# Altium PCB QR REEADER.PcbDoc
Units mil, origin at the board's own origin, x right, y up, seen from the top; angles counter-clockwise.
Board outline 2755 x 2755.91 mil, 2 copper layers (Top Layer, Bottom Layer); 51 components, 39 nets, 195 pads, 82 vias.
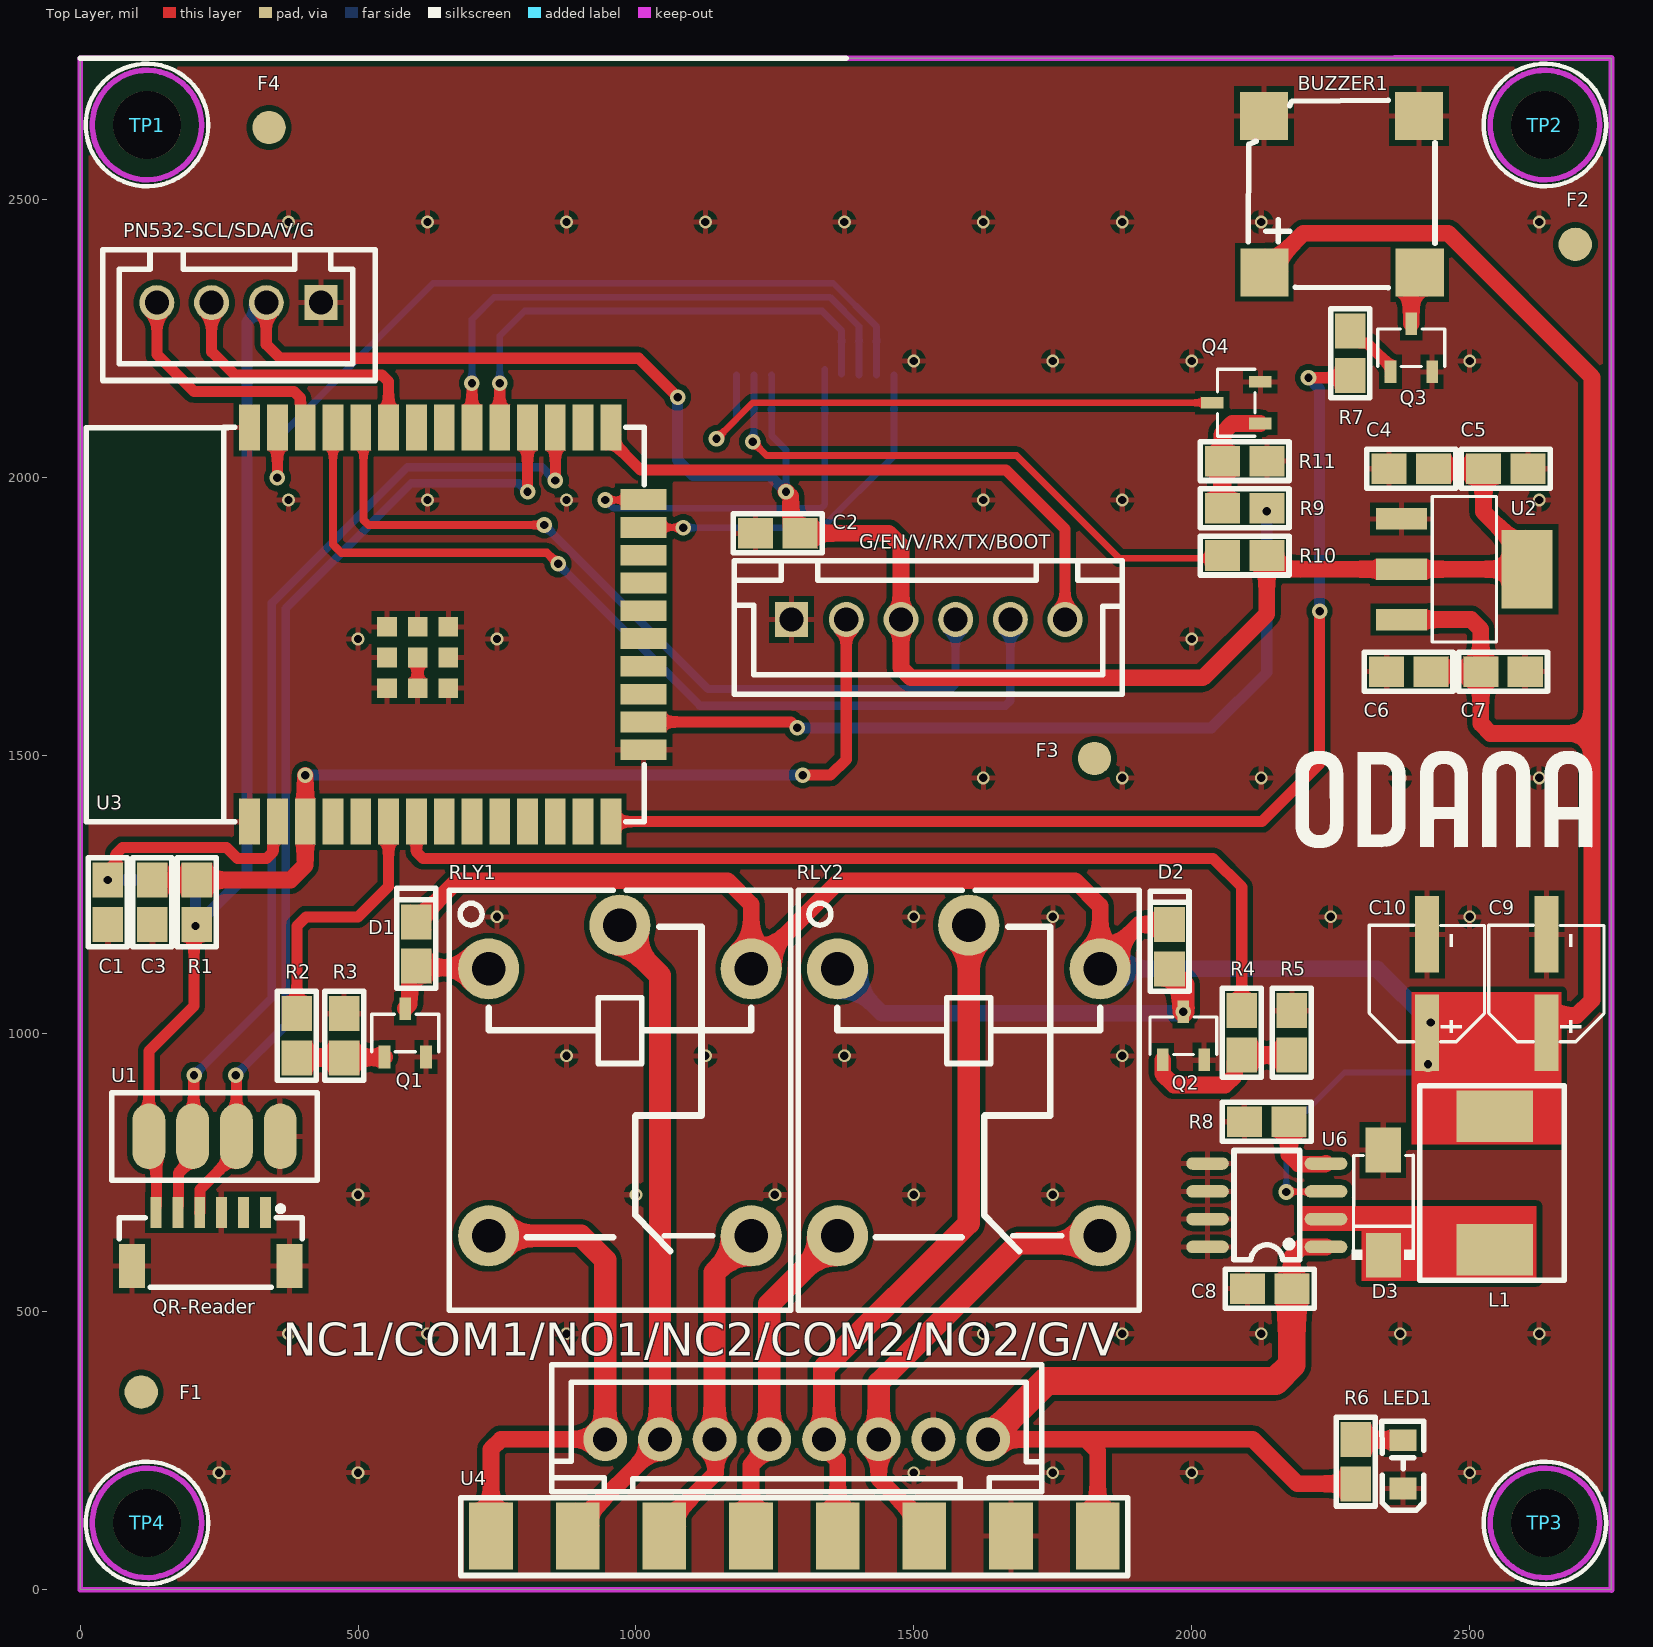
[diagram p0: Top Layer view]
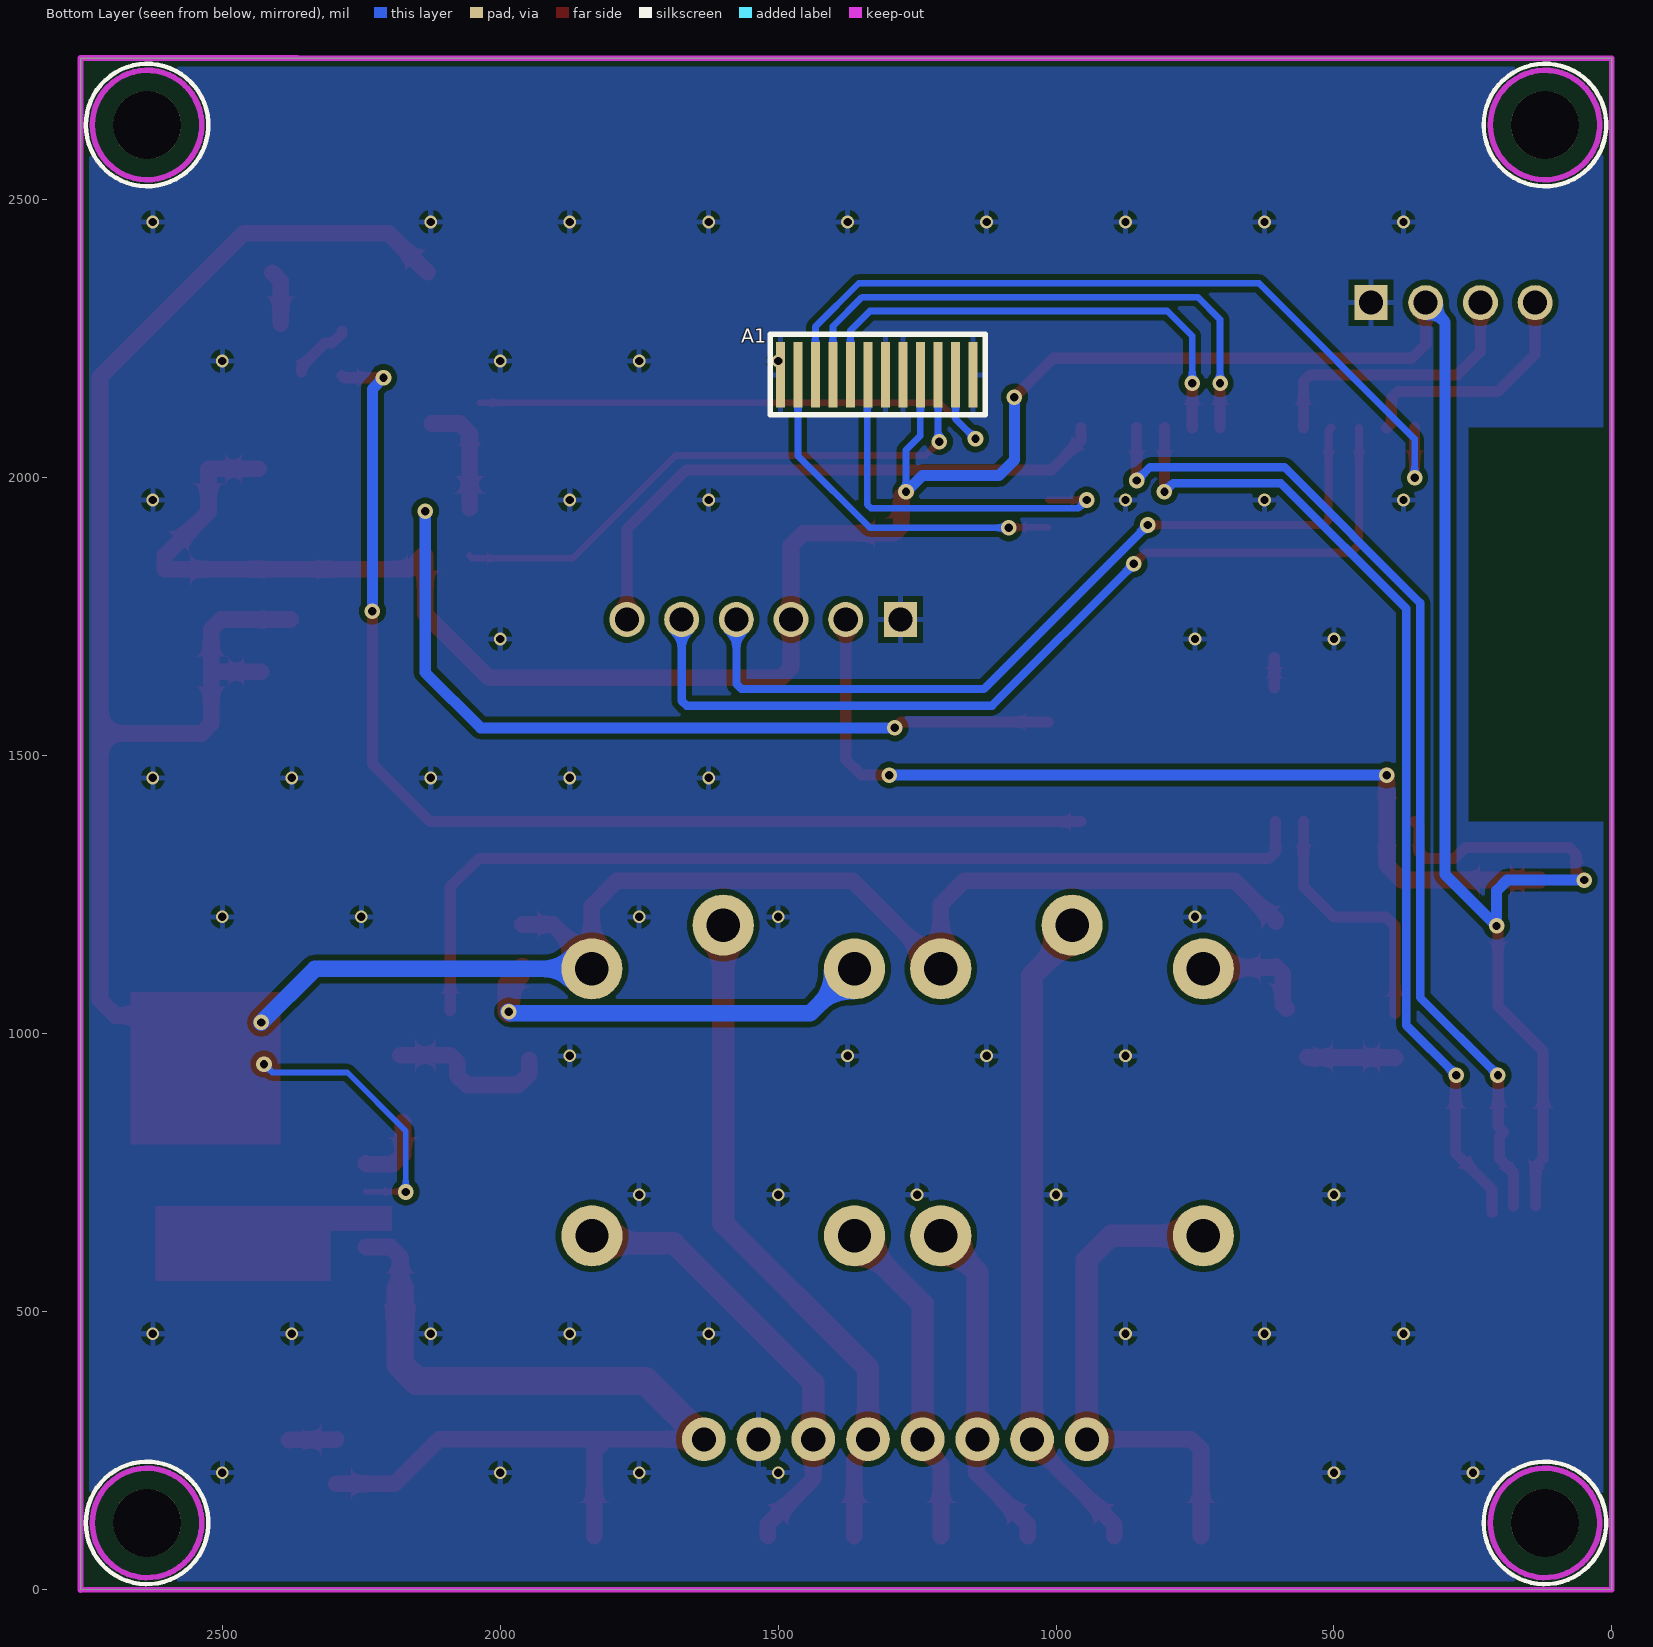
[diagram p1: Bottom Layer view, seen from below]

## Layer stack, top to bottom
Top Solder: solder mask 0.4, Solder Resist, Dk 3.5
Top Layer: signal copper 1.4
Dielectric 1: dielectric 12.6, FR-4, Dk 4.8
Bottom Layer: signal copper 1.4
Bottom Solder: solder mask 0.4, Solder Resist, Dk 3.5

## Board outline
0,0 0,2754.75 0.25,2755 2755,2755 2755,-0.91

## Design rules (kind name [scope] priority, off if disabled: settings)
Clearance [All] p1: gap=10 ignorepadtopadclearanceinfootprint=TRUE except(0: Arc-Hole Track-Hole SMDPad-Hole THPad-Hole Via-Hole Fill-Hole Poly-Hole Region-Hole Text-Hole)
ComponentClearance [All] p1: gap=-39.37 collisioncheckmode=3 verticalgap=-39.37 showdistances=FALSE donotcheckwithout3dbody=TRUE
HoleSize [All] p1: absolutevalues=TRUE maxlimit=250 minlimit=1 maxpercent=80.000 minpercent=20.000
PolygonConnect [All] p1: connectstyle=Relief reliefconductorwidth=10 reliefentries=4 polygonreliefangle="90 Angle" airgapwidth=10
RoutingVias [All] p1: holewidth=28 width=50 viastyle="Through Hole" minholewidth=28 minwidth=50 maxholewidth=28 maxwidth=50
SolderMaskExpansion [All] p1: expansion=4 istentingtop=FALSE
Width [All] p1: maxlimit=200 minlimit=5 preferedwidth=10
28 further rules are at their usual default settings.

## Components (designator, comment, footprint, x,y, rotation, side; value= is the part's Value field where it differs from the comment)
A1 "" "TFT SCREEN" 1149.41,2185 r180 bottom locked
BUZZER1 "klj-8530-5027" BUZ-SMD_4P-L8.5-W8.5-TL 2270,2510 r90 top
C1 "Cap Semi" 0805 50,1236.16 r90 top value=106
C2 "Cap Semi" 0805 1255,1900 r180 top value=104
C3 "Cap Semi" 0805 130,1236.16 r90 top value=104
C4 "Cap Semi" 0805 2395,2016.16 r0 top value=104
C5 "Cap Semi" 0805 2565,2016.16 r0 top value=105
C6 "Cap Semi" 0805 2390,1651.16 r180 top value=105
C7 "Cap Semi" 0805 2560,1651.16 r180 top value=104
C8 "105" 0805 2140,541.16 r0 top value=105/50V
C9 "JVJ16V47M5X5" CAP-SMD_BD5.0-L5.3-W5.3-LS6.5-FD-1 2638.55,1090.06 r90 top
C10 "JVJ16V47M5X5" CAP-SMD_BD5.0-L5.3-W5.3-LS6.5-FD-1 2423.55,1090.06 r90 top
D1 "1N4148WS" SOD323 605,1161.16 r90 top
D2 "1N4148WS" SOD323 1960,1156.16 r90 top
D3 "ss34_c47018524" SMA_L4.3-W2.6-LS5.0-RD 2344.6,695.76 r90 top
F1 "" FIDUCIAL-1.5X3 110,355 r0 top
F2 "" FIDUCIAL-1.5X3 2690,2420 r0 top
F3 "" FIDUCIAL-1.5X3 1825,1495 r0 top
F4 "" FIDUCIAL-1.5X3 340,2630 r0 top
G/EN/V/RX/TX/BOOT "ZX-XH2.54-6PZZ" CONN-TH_6P-P2.50_ZX-XH2.54-6PZZ 1526.07,1745 r180 top
L1 "FXL0630-68R-M" "0630 - duplicate" 2545,731.16 r270 top
LED1 "ncd0805r1" LED0805-RD 2380,225 r90 top
NC1/COM1/NO1/NC2/COM2/NO2/G/V "zx-xh2.54-8pzz" CONN-TH_8P-P2.50-XH2.54-8P 1289.2,269.99 r180 top
PN532-SCL/SDA/V/G "ZX-XH2.54-4PZZ" CONN-TH_4P-P2.50_4PIN 285.8,2315 r180 top
Q1 "S8050 J3Y" SOT-23-3_L3.0-W1.7-P0.95-LS2.9-BR 585,1001.16 r270 top
Q2 "S8050 J3Y" SOT-23-3_L3.0-W1.7-P0.95-LS2.9-BR 1985,996.16 r270 top
Q3 "S8050 J3Y" SOT-23-3_L3.0-W1.7-P0.95-LS2.9-BR 2395,2233.81 r270 top
Q4 "S8050 J3Y" SOT-23-3_L3.0-W1.7-P0.95-LS2.9-BR 2080,2135 r0 top
QR-Reader "zx-sh1.0-6plt" CONN-SMD_6P-P1.00_ZX-SH1.0-6PLT 235,630 r0 top
R1 "Res3" 0805 210,1236.16 r90 top value=10K
R2 "R0805-1K" 0805 390,996.16 r270 top value=1K
R3 "R0805-10K" 0805 475,996.16 r270 top value=1K
R4 "R0805-1K" 0805 2090,1001.16 r270 top value=1K
R5 "R0805-10K" 0805 2180,1001.16 r270 top value=1K
R6 "R0805-4K7" 0805 2295,230 r270 top value=1K
R7 "R0805-1K" 0805 2285,2223.81 r90 top value=1K
R8 "100K" 0805 2135,841.16 r180 top
R9 "Res3" 0805 2095,1945 r0 top value=2K2
R10 "Res3" 0805 2095,1860 r0 top value=10R
R11 "Res3" 0805 2095,2030 r0 top value=10K
RLY1 "srd-05vdc-sl-c" RELAY-TH_SRD-XXVDC-XL-C 971.2,915.66 r270 top
RLY2 "srd-05vdc-sl-c" RELAY-TH_SRD-XXVDC-XL-C 1598.8,915.66 r270 top
TP1 "" "PCBComponent_1 - duplicate" 120,2635 r0 top locked
TP2 "" "PCBComponent_1 - duplicate" 2635,2635 r0 top locked
TP3 "" "PCBComponent_1 - duplicate" 2635,120 r0 top
TP4 "" "PCBComponent_1 - duplicate" 120,120 r0 top
U1 "" 2.54_PAD_4P 241.89,815 r270 top
U2 "AMS1117-3.3" SOT-223-3_L6.7-W3.7-P2.30-LS7.0-BR 2480,1835.41 r180 top
U3 "ESP32-WROOM-32E-N4" WIFI-SMD_ESP32-WROOM-32E 659.43,1735.66 r0 top
U4 "" 3.96_PAD_8P 1285,135 r270 top
U6 "XL1509-5.0E1" SOIC-8_L5.0-W4.0-P1.27-LS6.0-BL 2135,691.16 r90 top

## Footprints (in the part's own frame and the unit in brackets; to place one, negate y for a bottom-side part, rotate by r counter-clockwise, add the part's x,y. Pads: shape width x height; smd on the part's side, far side on the other; paste and mask are expansions set on the pad)
2.54_PAD_4P [mm]
  oval 3x1.5 smd paste+0 mask+0.2: 1(0,3) 2(0,1) 3(0,-1) 4(0,-3)
  silkscreen extent -2,-4.7 2,4.7
3.96_PAD_8P [mil]
  rect 120x78.74 smd paste+0 mask+2: 1(38.86,-545.65) 2(38.86,-389.75) 3(38.86,-233.84) 4(38.86,-77.94) 5(38.86,77.97) 6(38.85,233.87) 7(38.85,389.78) 8(38.85,545.68)
  silkscreen extent -30,-600 110,600
"0630 - duplicate" [mm]
  rect 2.35x3.5 smd: 1(-3.048,0) 2(3.048,0)
  silkscreen extent -4.45,-3.43 4.45,3.17
0805 [mm] "Chip Capacitor, Body 2.0x1.3mm, IPC High Density"
  rect 1.6x1.4 smd: 1(-1.016,0) 2(1.016,0)
  silkscreen extent -2.03,-0.89 2.03,0.89, body extent -1.1,-0.72 1.1,0.72, height 1.4
BUZ-SMD_4P-L8.5-W8.5-TL [mil]
  rect 86.6x86.6 smd: 1(-140.5,139.4) 2(-141,-140.1) 3(140.9,-138.9) 4(141,140)
  silkscreen extent -168,-168 169,168
CAP-SMD_BD5.0-L5.3-W5.3-LS6.5-FD-1 [mm]
  rect 3.5x1.1 smd paste+0.051: 1(-2.245,0) 2(2.245,0)
  silkscreen extent -2.66,-2.62 2.66,2.65
CONN-SMD_6P-P1.00_ZX-SH1.0-6PLT [mil]
  rect 19.7x55.1 smd paste+0 mask+2: 1(98.4,48.2) 2(59,48.2) 3(19.6,48.2) 4(-19.7,48.2) 5(-59.1,48.2) 6(-98.5,48.2)
  rect 47.2x78.7 smd paste+0 mask+2: 7(-141.8,-48.2) 8(141.7,-48.2)
  silkscreen extent -164,-87 164,60
CONN-TH_4P-P2.50_4PIN [mm]
  rect 1.524x1.6 hole 1.1: 1(-3.75,0)
  round 1.6 hole 1.1: 2(-1.25,0) 3(1.25,0) 4(3.75,0)
  silkscreen extent -6.22,-2.41 6.22,3.56
CONN-TH_6P-P2.50_ZX-XH2.54-6PZZ [mm]
  rect 1.524x1.6 hole 1.1: 1(6.25,0)
  round 1.6 hole 1.1 copper offset 0,0: 2(3.75,0) 4(-1.25,0) 5(-3.75,0) 6(-6.25,0)
  round 1.6 hole 1.1: 3(1.25,0)
  silkscreen extent -8.87,-2.68 8.87,3.42
CONN-TH_8P-P2.50-XH2.54-8P [mm]
  round 2 hole 1.1: 1(8.75,0) 2(6.25,0) 3(3.75,0) 4(1.25,0) 5(-1.25,0) 6(-3.75,0) 7(-6.25,0) 8(-8.75,0)
  silkscreen extent -11.2,-3.4 11.2,2.4
FIDUCIAL-1.5X3 [mil]
  round 60 smd: 17(0,0)
LED0805-RD [mil]
  rect 39.4x49.2 smd: 1(-43.3,0) 2(43.3,0)
  silkscreen extent -83,-37 78,38
"PCBComponent_1 - duplicate" [mm]
  round 3.1 hole 3.1 unplated paste-2539.97: ""(0.011,-0.01)
  silkscreen extent -2.79,-2.81 2.81,2.79
RELAY-TH_SRD-XXVDC-XL-C [mil]
  round 110 hole 60: 1(-200.8,-236.2) 2(279.5,-236.2) 3(279.5,236.2) 4(-200.8,236.3) 5(-279.5,0)
  silkscreen extent -343,-307 413,307
SMA_L4.3-W2.6-LS5.0-RD [mil]
  rect 80.6x63.8 smd: 1(-94.6,-0.4) 2(94.7,0.4)
  silkscreen extent -103,-57 85,57
SOD323 [mm] "Chip Capacitor, Body 2.0x1.3mm, IPC High Density"
  rect 1.6x1.4 smd: 1(-1.016,0) 2(1.016,0)
  silkscreen extent -2.03,-0.89 2.54,0.89, body extent -1.1,-0.72 1.1,0.72, height 1.4
SOIC-8_L5.0-W4.0-P1.27-LS6.0-BL [mil]
  oval 22.4x76.8 smd: 1(-75,-106.5) 2(-25,-106.5) 3(25,-106.5) 4(75,-106.5) 5(75,106.5) 6(25,106.5) 7(-25,106.5) 8(-75,106.5)
  silkscreen extent -98,-59 98,59
SOT-23-3_L3.0-W1.7-P0.95-LS2.9-BR [mil]
  rect 40.85x20.95 smd: 1(43.36,-37.4) 2(43.36,37.4) 3(-43.36,0)
  silkscreen extent -34,-60 34,60
SOT-223-3_L6.7-W3.7-P2.30-LS7.0-BR [mm]
  rect 2.34x0.98 smd paste+0 mask+0.051: 1(2.606,-2.3) 2(2.606,0) 3(2.606,2.3)
  rect 2.34x3.6 smd paste+0 mask+0.051: 4(-3.134,0)
  silkscreen extent -1.74,-3.33 1.21,3.33
"TFT SCREEN" [mm]
  rect 0.4x3 smd paste+0 mask+0.102: 1(0,0) 2(-0.8,0) 3(-1.6,0) 4(-2.4,0) 5(-3.2,0) 6(-4,0) 7(-4.8,0) 8(-5.6,0) 9(-6.4,0) 10(-7.2,0) 11(-8,0) 12(-8.8,0)
  silkscreen extent -9.27,-1.83 0.57,1.86
WIFI-SMD_ESP32-WROOM-32E [mm]
  rect 0.95x2.1 smd: 1(-9.003,-9) 2(-7.733,-9) 3(-6.463,-9) 4(-5.193,-9) 5(-3.923,-9) 6(-2.653,-9) 7(-1.383,-9) 8(-0.113,-9) 9(1.157,-9) 10(2.427,-9) 11(3.697,-9) 12(4.967,-9) 13(6.237,-9) 14(7.507,-9) 25(7.507,9) 26(6.237,9) 27(4.967,9) 28(3.697,9) 29(2.427,9) 30(1.157,9) 31(-0.113,9) 32(-1.383,9) 33(-2.653,9) 34(-3.923,9) 35(-5.193,9) 36(-6.463,9) 37(-7.733,9) 38(-9.003,9)
  rect 2.1x0.95 smd: 15(9.003,-5.715) 16(9.003,-4.445) 17(9.003,-3.175) 18(9.003,-1.905) 19(9.003,-0.635) 20(9.003,0.635) 21(9.003,1.905) 22(9.003,3.175) 23(9.003,4.445) 24(9.003,5.715)
  rect 0.9x0.9 smd: 39(-2.722,-2.9) 39(-2.722,-1.5) 39(-2.722,-0.1) 39(-1.322,-2.9) 39(-1.322,-1.5) 39(-1.322,-0.1) 39(0.078,-2.9) 39(0.078,-1.5) 39(0.078,-0.1)
  silkscreen extent -16.48,-9 9.02,9.02

## Part data
A1: library part TFT1.54
BUZZER1: JLCPCB Part Class="Extended Part", LCSC Part Name=贴片蜂鸣器, Manufacturer=KELIKING(凯丽金), ManufacturerPart=KLJ-8530-5027, AddInBom=yes, ConvertToPcb=yes, Datasheet=https://item.szlcsc.com/datasheet/KLJ-8530-5027/579412.html, FootprintName=BUZ-SMD_4P-L8.5-W8.5-TL, ModelId=7c587082926741939d0805ac9c9a57ec, ModelName=BUZ-SMD_4P-L8.5-W8.5-H4.0, ModelTransform=342.519,342.519,0,270,0,0,0.5,0.435,0, Supplier=LCSC, Supplier Footprint=SMD,8.5x8.5mm, SupplierPart=C556938, Symbol=KLJ-8530-5027
C1 C2 C3 C4 C5 C6 C7: "Capacitor (Semiconductor SIM Model)", LatestRevisionDate=29-May-2009, LatestRevisionNote="IPC-7351 Footprint Added.", PackageDescription="Chip Capacitor", PackageReference=C1206, Published=8-Jun-2000, Publisher="Altium Limited"
C8: library part "Cap Semi", "Capacitor (Semiconductor SIM Model)", LatestRevisionDate=29-May-2009, LatestRevisionNote="IPC-7351 Footprint Added.", PackageDescription="Chip Capacitor", PackageReference=C1206, Published=8-Jun-2000, Publisher="Altium Limited"
D3: "二极管配置:独立式;直流反向耐压(Vr):40V;整流电流:3A;", Current - Rectified=3A, JLCPCB Part Class="Extended Part", LCSC Part Name="电压:40V 电流:3A", Manufacturer=baocheng(宝乘), ManufacturerPart=SS34, Non-Repetitive Peak Forward Surge Current=80A, Operating Junction Temperature Range=-55℃~+125℃, Voltage - DC Reverse(Vr)=40V, AddInBom=yes, ConvertToPcb=yes, Datasheet=https://item.szlcsc.com/datasheet/SS34/49200019.html, Diode Configuration=独立式, FootprintName=SMA_L4.3-W2.6-LS5.0-RD, ModelId=8d2dd2e50a3a4b27821fa63d469a8f11, ModelName=SMA_L4.3-W2.6-LS5.0-RD, ModelTransform=196.85,102.362,0,0,0,0,0,0,0, Supplier=LCSC, Supplier Footprint=SMA, SupplierPart=C47018524, Symbol=SS34_C47018524
F1 F2 F3 F4: library part FIDUCIAL1.5X3
G/EN/V/RX/TX/BOOT PN532-SCL/SDA/V/G: Current Rating (Max)=3A, JLCPCB Part Class="Extended Part", Manufacturer=Megastar(兆星), Operating Temperature Range=-25℃~+85℃, Add into BOM=yes, Contact Material=黄铜, Contact Plating=锡, Convert to PCB=yes, Mounting Style=直插, Number of Rows=1, Pitch=2.54mm, Reference Series=XH, Row Spacing=-, Supplier=LCSC
  G/EN/V/RX/TX/BOOT: Datasheet=https://atta.szlcsc.com/upload/public/pdf/source/20230619/1243AD0A516E39CD3D274D8985780568.pdf, Device=ZX-XH2.54-6PZZ, LCSC Part Name=ZX-XH2.54-6PZZ, Manufacturer Part=ZX-XH2.54-6PZZ, Number of Pins=6P, Number of PINs Per Row=6, Pins Structure=1x6P, Supplier Footprint=插件,P=2.54mm, Supplier Part=C7429636, Symbol=ZX-XH2.54-6PZZ
  PN532-SCL/SDA/V/G: Datasheet=https://atta.szlcsc.com/upload/public/pdf/source/20230619/B529A2163E0159A644AB3383D208FB03.pdf, Device=ZX-XH2.54-4PZZ, LCSC Part Name=ZX-XH2.54-4PZZ, Manufacturer Part=ZX-XH2.54-4PZZ, Number of Pins=4P, Number of PINs Per Row=4, Pins Structure=1x4P, Supplier Footprint=插件,P=2.5mm, Supplier Part=C7429634, Symbol=ZX-XH2.54-4PZZ
L1: library part FXL0630-8R2-M, Symbol=FXL0630-8R2-M
LED1: "灯头类型:-;发光颜色:红色;正向压降(Vf):1.6V~2.6V;功率:65mW;正向电流:25mA;波长:615nm~630nm;二极管配置:独立二极管;透镜颜色:-;色温:-;发光强度:195mcd;发光角度:130°;载带方式:-;工作温度:-30℃~+85℃;", Color Temperature=-, Forward Current=25mA, Illumination Color=红色, JLCPCB Part Class="Basic Part", LCSC Part Name=片式发光二极管, Manufacturer=国星光电, ManufacturerPart=NCD0805R1, Operating Temperature=-30℃~+85℃, Power(Watts)=65mW, Voltage - Forward(Vf)=1.6V~2.6V, AddInBom=yes, ConvertToPcb=yes, Datasheet=https://item.szlcsc.com/datasheet/NCD0805R1/85425.html, Diode Configuration=独立二极管, FootprintName=LED0805-RD, Lamp Holder Type=-, Lens Color=-, Luminous Intensity=195mcd, ModelId=b1c5ed7a4f6e46d3bc6f6cc7c20f3fea, ModelName=LED0805-RD, ModelTransform=79.527,49.2125,0,0,0,0,0,0,0, Mounting Style=-, Peak Wavelength=630nm, Supplier=LCSC, Supplier Footprint=0805, SupplierPart=C84256, Symbol=FC-2012HRK-620D, Viewing Angle=130°, Wavelength - Dominant=615nm~630nm
NC1/COM1/NO1/NC2/COM2/NO2/G/V: "插针结构:1x8P;间距:2.5mm;安装方式:直插;参考系列:XH;总PIN数:8P;排数:1;每排PIN数:8;行距:-;额定电流:3A;触头材质:黄铜;触头镀层:锡;工作温度:-25℃~+85℃;", Color=白色, Current Rating=3A, Flame Retardant Rating=UL94V-0, JLCPCB Part Class="Extended Part", LCSC Part Name="1x8P 间距:2.5mm 直插 系列:XH", Manufacturer=Megastar(兆星), ManufacturerPart=ZX-XH2.54-8PZZ, Operating Temperature=-25℃~+85℃, Voltage Rating=250V, AddInBom=yes, Contact Material=黄铜, Contact Plating=锡, ConvertToPcb=yes, Datasheet=https://item.szlcsc.com/datasheet/ZX-XH2.54-8PZZ/8427555.html, FootprintName=CONN-TH_8P-P2.50-XH2.54-8P, ModelId=385b1d4b778b4141959d674ea048df76, ModelName=CONN-TH_8P-P2.50-XH2.54-8P, ModelTransform=885.825,228.346,0,180,0,0,0.591,-19.094,-137.795, Mounting Type=直插, Number of Pins=8P, Number of PINs Per Row=8, Number of Rows=1, Pins Structure=1x8P, Pitch=2.5mm, Plastic Material=PA66, Reference Series=XH, Row Spacing=-, Supplementary Features=-, Supplier=LCSC, Supplier Footprint=插件,P=2.5mm, SupplierPart=C7429638, Symbol=ZX-XH2.54-8PZZ, X-Length of Bottom Edge on Board (Spacing Line)=22.5mm, Y-Width of Bottom Edge on Board=5.9mm, Z-Height of the Board=7mm
Q1 Q2 Q3 Q4: library part "S8050 J3Y_C2146", Collector Current (Ic)=500mA, Collector Cut-Off Current (Icbo)=100nA, Collector-Emitter Breakdown Voltage (Vceo)=25V, Collector-Emitter Saturation Voltage (VCE(sat)@Ic,Ib)=600mV@500mA,50mA, DC Current Gain (hFE@Ic,Vce)=200@50mA,1V, JLCPCB Part Class="Basic Part", LCSC Part Name="S8050 J3Y(RANGE:200-350) H档(200-350)", Manufacturer=CJ(江苏长电/长晶), Operating Temperature=-, Power Dissipation (Pd)=300mW, Transition Frequency (fT)=150MHz, Add into BOM=yes, Convert to PCB=yes, Datasheet=https://atta.szlcsc.com/upload/public/pdf/source/20140809/1457707209234.pdf, Device="S8050 J3Y_C2146", Manufacturer Part="S8050 J3Y", Name="S8050 J3Y", Supplier=LCSC, Supplier Footprint=SOT-23, Supplier Part=C2146, Symbol=S8050_C2146, Transistor Type=NPN
QR-Reader: "插针结构:1x6P;间距:1mm;安装方式:立贴;参考系列:SH;总PIN数:6P;排数:1;每排PIN数:6;行距:-;额定电流:1A;触头材质:黄铜;触头镀层:锡;工作温度:-40℃~+85℃;", Color=米色, Current Rating=1A, Flame Retardant Rating=-, JLCPCB Part Class="Extended Part", LCSC Part Name="1x6P 间距:1mm 立贴 系列:SH", Manufacturer=Megastar(兆星), ManufacturerPart=ZX-SH1.0-6PLT, Operating Temperature=-40℃~+85℃, Voltage Rating=50V, AddInBom=yes, Contact Material=黄铜, Contact Plating=锡, ConvertToPcb=yes, Datasheet=https://item.szlcsc.com/datasheet/ZX-SH1.0-6PLT/8430324.html, FootprintName=CONN-SMD_6P-P1.00_ZX-SH1.0-6PLT, ModelId=10d6ea9a3ab947538cc5c23cc299ff3f, ModelName=CONN-SMD_6P-P1.00_ZX-SH1.0-6PLT, ModelTransform=328.7395,147.638,0,0,0,0,0,-13.071,0, Mounting Type=立贴, Number of Pins=6P, Number of PINs Per Row=6, Number of Rows=1, Pins Structure=1x6P, Pitch=1mm, Plastic Material=LCP, Reference Series=SH, Row Spacing=-, Supplementary Features=辅助焊脚, Supplier=LCSC, Supplier Footprint=SMD,P=1mm, SupplierPart=C7430455, Symbol=ZX-SH1.0-6PLT, X-Length of Bottom Edge on Board (Spacing Line)=8.35mm, Y-Width of Bottom Edge on Board=3.05mm, Z-Height of the Board=4.4mm
R1 R9 R10 R11: "Resistor", LatestRevisionDate=29-May-2009, LatestRevisionNote="IPC-7351 Footprint Added.", PackageDescription="Chip Resistor", PackageReference=J1-0603, Published=8-Jun-2000, Publisher="Altium Limited"
R2 R3 R4 R5 R6 R7 R8: library part Res3, "Resistor", LatestRevisionDate=29-May-2009, LatestRevisionNote="IPC-7351 Footprint Added.", PackageDescription="Chip Resistor", PackageReference=J1-0603, Published=8-Jun-2000, Publisher="Altium Limited"
RLY1 RLY2: "线圈电压:5V;触点形式:一组转换:1C(单刀双掷-转换);触点容量(电阻负载):-;最大切换电压:250V@AC;最大切换电流:15A;", Coil Rated Power=360mW, Coil Resistance=70Ω, Coil Voltage=5V, Contact Rating=-, Contact Resistance=100mΩ, JLCPCB Part Class="Extended Part", LCSC Part Name="蓝色 单组转换型继电器", Manufacturer=松乐, ManufacturerPart=SRD-05VDC-SL-C, Switching Current(Max)=15A, Switching Voltage(Max)=250V@AC, AddInBom=yes, Coil Type=无极性-单线圈, Contact Form=一组转换:1C(单刀双掷-转换), ConvertToPcb=yes, Datasheet=https://item.szlcsc.com/datasheet/SRD-05VDC-SL-C/36422.html, FootprintName=RELAY-TH_SRD-XXVDC-XL-C, Length=19.2mm, ModelId=d0eda9b8bf8746d18ae810ab88dc78e7, ModelName=RELAY-TH_L19.2-W15.6-H15.8, ModelTransform=755.904,622.4397,0,0,0,0,34.882,0,-118.11, Number of Pins=5, Operate Time=10ms, Release Time=10ms, Supplier=LCSC, Supplier Footprint=插件,19.2x15.6mm, SupplierPart=C35449, Symbol=SRD-05VDC-SL-C, Width=15.6mm
TP1 TP2 TP3 TP4: library part M3铜柱
U1: library part 当面2.54焊盘
U2: library part AMS1117-3.3_C917183
U3: JLCPCB Part Class="Extended Part", LCSC Part Name="通用型Wi-Fi+BT+BLE MCU模组", Manufacturer=ESPRESSIF(乐鑫), Add into BOM=yes, Convert to PCB=yes, Datasheet=https://atta.szlcsc.com/upload/public/pdf/source/20220601/0020821B65DE5740BBACA5FACC5CF3B6.pdf, Device=ESP32-WROOM-32E-N4, Manufacturer Part=ESP32-WROOM-32E-N4, Supplier=LCSC, Supplier Footprint=SMD,18x25.5mm, Supplier Part=C701341, Symbol=ESP32-WROOM-32E(4MB)
U4: library part 8P焊盘底面层
U6: Input Voltage=4.5V~40V, JLCPCB Part Class="Basic Part", LCSC Part Name="2A 150KHz 40V 降压 DC-DC 转换器", Manufacturer=XLSEMI(芯龙), Operating Temperature=-40℃~+85℃, Output Current=2A, Output Voltage=5V, Quiescent Current (Iq)=150uA, Switching Frequency=150kHz, Add into BOM=yes, Convert to PCB=yes, Datasheet=https://atta.szlcsc.com/upload/public/pdf/source/20151126/1457707596805.pdf, Device=XL1509-5.0E1, Function=降压型, Manufacturer Part=XL1509-5.0E1, Number of Outputs=1, Output Type=固定, Supplier=LCSC, Supplier Footprint=SOIC-8, Supplier Part=C61063, Switch tube (built-in/external)=内置, Symbol=XL1509-5.0E1, Synchronous Rectification=否, Topology=降压式
C9 C10: Symbol=JVJ16V47M5X5

## Via types
v1: diameter 23, hole 15, Top Layer to Bottom Layer, 55 vias
v2: diameter 28, hole 15, Top Layer to Bottom Layer, 27 vias

## Nets (pads, with @x,y where several pads share a name; then routed paths per layer and width w, separated by ;. In a path a pad name is that pad's centre, name@x,y a point inside that pad or via, vN(x,y) a via of type N, cw(c..) or ccw(c..) an arc to the next point about the centre after c; other vN are vias at no path point)
3V3: A1.4 C1.2 C2.1 C4.2 C5.1 G/EN/V/RX/TX/BOOT.3 PN532-SCL/SDA/V/G.2 QR-Reader.6 R1.1 R10.2 U1.4 U2.2 U2.4 U3.2 | length 5863.8
  Top Layer w20: v2(50,1276.16) 64.36,1290.52 64.36,1323.28 76.07,1335 263.01,1335 283.01,1315 335.43,1315 347.15,1326.72 347.15,1373.48 U3.2 ; QR-Reader.6@137.5,690 137.5,761.18 123.78,774.9 U1.4 123.78,968.78 205,1050 205,1191.16 R1.1 ; PN532-SCL/SDA/V/G.2 335,2239.99 360,2215 1005,2215 v2(1075,2145)
  Top Layer w30: v2(1270,1975) 1278.5,1966.5 1278.5,1912.56 1291.06,1900 1455,1900 1476.85,1878.16 G/EN/V/RX/TX/BOOT.3 1476.85,1658.16 1495,1640 2020,1640 2135,1755 R10.2 ; R10.2@2138.94,1860 2163.53,1835.41 U2.2 U2.4 2603.38,1860.21 2525,1938.6 C5.1 C4.2
  Bottom Layer w12: A1.4 1244.11,2184.79 1244.11,2075.89 1270,2050 v2(1270,1975)
  Bottom Layer w20: v2(50,1276.16) 188.28,1276.16 207.5,1256.94 v2(207.5,1193.66) 300,1286.16 300,2280 PN532-SCL/SDA/V/G.2 ; v2(1075,2145) 1075,2031.72 1102.86,2003.86 1240.33,2003.86 1269.19,1975 v2(1270,1975)
+5: BUZZER1.1 C6.1 C7.2 C9.1 C10.1 D1.2 D2.2 L1.1 RLY1.4 RLY2.4 U2.3 U6.3 | length 5691.3
  Top Layer w10: v2(2170,715) 2170.58,715.58 2240.92,715.58 U6.3
  Top Layer w20: C9.1 2638.55,1006.83 C9.1@2650.2,1018.48
  Top Layer w30: D1.2 605,1205.1 617.56,1217.66 621.5,1217.66 679,1275.16 1164.84,1275.16 1207.5,1232.5 RLY1.4 1366.2,1275.16 1789.84,1275.16 1835.1,1229.9 RLY2.4 1835.1,1126.3 1905.01,1196.21 1959.95,1196.21 D2.2 ; BUZZER1.1 2201.1,2440 2461.06,2440 2720,2181.06 2720,1540 ; U2.3 2502.43,1744.86 2520,1727.29 C7.2 ; C6.1 C7.2 ; 2530,937.5 2571.05,978.55 2638.55,978.55 2638.55,1020.97 2650,1032.43 2692.43,1032.43 2720,1060 2720,1540 ; 2610,1000 2610,1020 C9.1@2638.55,1048.55 ; C7.2 2520,1557.57 2537.57,1540 2720,1540
  Bottom Layer w10: v2(2170,715) 2170,825 2275,930 2410,930 v2(2425,945)
  Bottom Layer w30: RLY2.4 2333.54,1116.46 v2(2430,1020)
BL: R9.2 U3.16 | length 1457
  Top Layer w20: U3.16 1279.33,1560.67 v2(1290,1550)
  Bottom Layer w20: v2(1290,1550) 2035,1550 2135,1650 v2(2135,1940)
BOOT: G/EN/V/RX/TX/BOOT.6 U3.25 | length 1068.7
  Top Layer w20: U3.25 955,2067.36 1008.36,2014 1666,2014 1772.13,1907.86 G/EN/V/RX/TX/BOOT.6
BUZZER: R7.1 U3.14 | length 2097.8
  Top Layer w20: U3.14 2126.33,1381.33 2230,1485 v2(2230,1760) ; v2(2210,2180) 2281.19,2180 R7.1
  Bottom Layer w20: v2(2210,2180) 2230,2160 v2(2230,1760)
COM1: NC1/COM1/NO1/NC2/COM2/NO2/G/V.2 RLY1.5 U4.2 | length 1190.1
  Top Layer w30: U4.2 895.25,116.77 1043.15,264.67 NC1/COM1/NO1/NC2/COM2/NO2/G/V.2
  Top Layer w40: RLY1.5 971.2,1176.41 1043.14,1104.47 NC1/COM1/NO1/NC2/COM2/NO2/G/V.2@1043.14,270.01
COM2: NC1/COM1/NO1/NC2/COM2/NO2/G/V.5 RLY2.5 U4.5 | length 1217
  Top Layer w30: NC1/COM1/NO1/NC2/COM2/NO2/G/V.5 1338.41,256.81 1362.97,232.25 U4.5
  Top Layer w40: NC1/COM1/NO1/NC2/COM2/NO2/G/V.5 1338.41,398.41 1598.8,658.8 RLY2.5
CS: A1.8 U3.29 | length 891.7
  Top Layer w20: U3.29 v2(755,2170)
  Bottom Layer w12: 754.97,2255.03 799.94,2300 1335,2300 1370,2265 A1.8@1370,2186.5 ; v2(755,2170) 755,2255
DCX: A1.7 U3.24 | length 716.2
  Top Layer w12: v2(945,1960) 1013.19,1960 U3.24
  Bottom Layer w12: v2(945,1960) 960.03,1945 1332.97,1945 1340,1952.03 A1.7@1340,2194.99
EN: C3.2 G/EN/V/RX/TX/BOOT.2 R1.2 U3.3 | length 1685.1
  Top Layer w20: v2(1300,1465) 1350,1465 1378.42,1493.43 G/EN/V/RX/TX/BOOT.2
  Top Layer w30: C3.2 378.59,1276.16 405,1302.57 v2(405,1465)
  Bottom Layer w20: v2(405,1465) v2(1300,1465)
GND: A1.1 A1.5 A1.6 A1.12 BUZZER1.3 BUZZER1.4 C1.1 C2.2 C3.1 C4.1 C5.2 C6.2 C7.1 C8.1 C9.2 C10.2 D3.2 G/EN/V/RX/TX/BOOT.1 LED1.1 NC1/COM1/NO1/NC2/COM2/NO2/G/V.7 PN532-SCL/SDA/V/G.1 Q1.2 Q2.2 Q3.2 Q4.2 QR-Reader.3 QR-Reader.7 QR-Reader.8 R3.1 R5.1 R8.2 R11.2 U1.1 U2.1 U3.1 U3.15 U3.38 U3.39 U4.7 U6.5 U6.6 U6.7 U6.8 | length 55.1
  Top Layer w20: U3.39@607.4,1621.49 U3.39@607.4,1676.6
  other v1: 250,210 500,210 1500,210 1750,210 2000,210 2500,210 375,460 625,460 875,460 1625,460 1875,460 2125,460 2375,460 2625,460 500,710 1000,710 1250,710 1500,710 1750,710 875,960 1125,960 1375,960 1875,960 750,1210 1500,1210 1750,1210 2250,1210 2500,1210 1625,1460 1875,1460 2125,1460 2375,1460 2625,1460 500,1710 750,1710 2000,1710 375,1960 625,1960 875,1960 1625,1960 1875,1960 2625,1960 1500,2210 1750,2210 2000,2210 2500,2210 375,2460 625,2460 875,2460 1125,2460 1375,2460 1625,2460 1875,2460 2125,2460 2625,2460
LEDK: A1.2 Q4.3 | length 1048.4
  Top Layer w12: v2(1145,2070) 1210,2135 Q4.3
  Bottom Layer w12: v2(1145,2070) 1180.91,2105.91 A1.2
NC1: NC1/COM1/NO1/NC2/COM2/NO2/G/V.3 RLY1.3 U4.3 | length 606.2
  Top Layer w30: U4.3 1051.16,116.77 1143.31,208.93 1143.31,268.25 NC1/COM1/NO1/NC2/COM2/NO2/G/V.3
  Top Layer w40: NC1/COM1/NO1/NC2/COM2/NO2/G/V.3 1141.57,570.32 RLY1.3
NC2: NC1/COM1/NO1/NC2/COM2/NO2/G/V.6 RLY2.3 U4.6 | length 817.3
  Top Layer w30: NC1/COM1/NO1/NC2/COM2/NO2/G/V.6 1436.85,198.8 1518.87,116.77 U4.6
  Top Layer w40: NC1/COM1/NO1/NC2/COM2/NO2/G/V.6 1436.85,371.85 1687.77,622.77 1821.61,622.77 RLY2.3
NetA1_3: A1.3 R10.1 | length 1055.1
  Top Layer w12: v2(1210,2065) 1235,2040 1685,2040 1870,1855 2050,1855 R10.1
  Bottom Layer w12: v2(1210,2065) 1212.4,2067.4 A1.3
NetBUZZER1_2: BUZZER1.2 Q3.3 | length 98.1
  Top Layer w30: Q3.3 2395,2353.9 BUZZER1.2
NetD1_1: D1.1 Q1.3 RLY1.1 | length 216.9
  Top Layer w30: Q1.3 585,1045.41 592.44,1052.86 592.44,1108.6 D1.1 607.35,1118.81 732.65,1118.81 RLY1.1
NetD2_1: D2.1 Q2.3 RLY2.1 | length 743.8
  Top Layer w40: D2.1 1967.56,1108.6 1967.56,1104.66 1985,1087.22 v2(1985,1039.52)
  Bottom Layer w30: RLY2.1 1442.6,1036.46 1981.94,1036.46 v2(1985,1039.52)
NetD3_1: D3.1 L1.2 U6.2
NetLED1_2: LED1.2 R6.1 | length 85.7
  Top Layer w30: R6.1 2295.85,269.15 2379.15,269.15 LED1.2
NetQ1_1: Q1.1 R2.2 R3.2 | length 158.3
  Top Layer w30: R2.2 390.82,956.98 546.78,956.98 Q1.1
NetQ2_1: Q2.1 R4.2 R5.2 | length 302.1
  Top Layer w30: Q2.1 1947.6,927.57 1967.8,907.38 2059.87,907.38 2077.44,924.95 2077.44,948.6 R4.2 R5.2
NetQ3_1: Q3.1 R7.2 | length 111.1
  Top Layer w20: R7.2 2285,2259.87 2302.56,2242.31 2315.69,2242.31 2357.6,2200.4 Q3.1
NetQ4_1: Q4.1 R9.1 R11.1 | length 210.7
  Top Layer w30: R9.1 R11.1 2055,2080.03 2072.57,2097.6 Q4.1
NetR8_1: R8.1 U6.4 | length 132.8
  Top Layer w30: R8.1 2175,782.57 2192.57,765 2240.34,765 U6.4
NO1: NC1/COM1/NO1/NC2/COM2/NO2/G/V.1 RLY1.2 U4.1 | length 919.3
  Top Layer w30: U4.1 739.35,252.43 756.93,270 NC1/COM1/NO1/NC2/COM2/NO2/G/V.1
  Top Layer w40: RLY1.2 901.16,636.16 944.72,592.6 NC1/COM1/NO1/NC2/COM2/NO2/G/V.1
NO2: NC1/COM1/NO1/NC2/COM2/NO2/G/V.4 RLY2.2 U4.4 | length 604.4
  Top Layer w30: U4.4 1207.06,223.87 1240,256.81 NC1/COM1/NO1/NC2/COM2/NO2/G/V.4
  Top Layer w40: NC1/COM1/NO1/NC2/COM2/NO2/G/V.4 1239.99,513.55 RLY2.2
ReaderSCL: PN532-SCL/SDA/V/G.4 U3.36 | length 440.8
  Top Layer w20: PN532-SCL/SDA/V/G.4 138.15,2221.72 204.87,2155 384.58,2155 396.3,2143.28 396.3,2098.7 U3.36
ReaderSDA: PN532-SCL/SDA/V/G.3 U3.33 | length 512.1
  Top Layer w20: PN532-SCL/SDA/V/G.3 236.59,2226.72 278.3,2185 543.28,2185 555,2173.28 U3.33
RELAY1: R2.1 U3.6 | length 468.2
  Top Layer w20: R2.1 390,1193.28 406.72,1210 500,1210 555,1265 U3.6
RELAY2: R4.1 U3.7 | length 1788
  Top Layer w20: U3.7 605,1326.72 616.72,1315 2038.28,1315 2090,1263.28 R4.1
RES: A1.11 U3.23 | length 650
  Top Layer w12: U3.23 1084.33,1910.67 v2(1085,1910)
  Bottom Layer w12: v2(1085,1910) 1335,1910 1464.37,2039.37 A1.11
RXD0: G/EN/V/RX/TX/BOOT.4 U3.34 | length 1479.1
  Top Layer w15: U3.34 510,2085 510,1923.79 518.79,1915 v2(835,1915)
  Bottom Layer w15: v2(835,1915) 1130,1620 1566.21,1620 1575,1628.79 1575,1744.71 G/EN/V/RX/TX/BOOT.4
SCLK: A1.9 U3.30 | length 1017.2
  Top Layer w20: U3.30 v2(705,2170)
  Bottom Layer w12: v2(705,2170) 705,2285 745,2325 1348.89,2325 1401.38,2272.51 A1.9
SDA: A1.10 U3.37 | length 1473.2
  Top Layer w20: v2(355,2000) U3.37
  Bottom Layer w12: v2(355,2000) 355,2070 635,2350 1355,2350 1432.87,2272.13 A1.10
TXD0: G/EN/V/RX/TX/BOOT.5 U3.35 | length 1698.7
  Top Layer w15: U3.35 455,1880 470,1865 840,1865 v2(860,1845)
  Bottom Layer w15: v2(860,1845) 1115,1590 1664.93,1590 1673.71,1598.79 G/EN/V/RX/TX/BOOT.5
U2RX: QR-Reader.5 U1.3 U3.27 | length 1876.8
  Top Layer w20: QR-Reader.5@176.9,690 176.9,749.28 202.52,774.9 U1.3 195.05,822.47 204.43,831.85 204.43,924.43 v2(205,925) ; v2(855,1995) U3.27
  Bottom Layer w15: v2(205,925) 345,1065 345,1775 589,2019 830.92,2019 854.92,1995 v2(855,1995)
U2TX: QR-Reader.4 U1.2 U3.28 | length 1801.1
  Top Layer w20: QR-Reader.4 215.45,678.35 215.45,719.66 281.26,785.47 281.26,922.93 280,924.19 v2(280,925) ; v2(805,1975) U3.28
  Bottom Layer w15: v2(280,925) 370,1015 370,1764.64 595.36,1990 789.71,1990 804.71,1975 v2(805,1975)
VCC: C8.2 NC1/COM1/NO1/NC2/COM2/NO2/G/V.8 R6.2 U4.8 U6.1 | length 1741.9
  Top Layer w30: NC1/COM1/NO1/NC2/COM2/NO2/G/V.8 2110,270 2190,190 R6.2 ; 1810,270 1819.99,260.01 1830.68,249.32 U4.8 ; C8.2 2180,598.59 2197.57,616.16 U6.1
  Top Layer w50: NC1/COM1/NO1/NC2/COM2/NO2/G/V.8 1738.7,375 2150.71,375 2180,404.29 C8.2
pads on no net: F1.17 F2.17 F3.17 F4.17 QR-Reader.1 QR-Reader.2 TP1. TP2. TP3. TP4. U3.4 U3.5 U3.8 U3.9 U3.10 U3.11 U3.12 U3.13 U3.17 U3.18 U3.19 U3.20 U3.21 U3.22 U3.26 U3.31 U3.32

## Polygon pours and split planes (outlines as drawn)
GND on Bottom Layer "GND_L02_P004" (solid, pour order 4): 0,0 0,2755 2755,2755 2755,0
GND on Top Layer "GND_L01_P005" (solid, pour order 5): 0,0 0,2755 2755,2755 2755,0

## Keep-outs
Keep-Out Layer:
  circle w10: c120.41,119.6 r98.43
  circle w10: c2635.41,119.6 r98.43
  circle w10: c2635.41,2634.6 r98.43
  circle w10: c120.41,2634.59 r98.43
  pour cut-out: 2635.41,21.17 cw(c2635.41,119.6) 2536.99,119.6 cw(c2635.41,119.6) 2635.41,218.02 cw(c2635.41,119.6) 2733.84,119.6 cw(c2635.41,119.6)
  pour cut-out: 120.41,21.17 cw(c120.41,119.6) 21.99,119.6 cw(c120.41,119.6) 120.41,218.02 cw(c120.41,119.6) 218.84,119.6 cw(c120.41,119.6)
  pour cut-out: 120.41,2536.17 cw(c120.41,2634.6) 21.99,2634.6 cw(c120.41,2634.6) 120.41,2733.02 cw(c120.41,2634.6) 218.84,2634.6 cw(c120.41,2634.6)
  pour cut-out: 2635.41,2536.17 cw(c2635.41,2634.6) 2536.99,2634.6 cw(c2635.41,2634.6) 2635.41,2733.02 cw(c2635.41,2634.6) 2733.84,2634.6 cw(c2635.41,2634.6)
  lines w10: 2755.91,-0.91 0,-0.91 0,2755 2755.91,2755
  lines w10.47: 2365,2755 2755,2755 2755,-0.91

## Other copper
Top Layer:
  rectangle net +5: 2395,800 2665,1075
  rectangle net NetD3_1: 2305,555 2620,670
  rectangle net NetD3_1: 2195,645 2620,690
  pour cut-out: 8.15,1380.67 8.15,2090.67 258.15,2090.67 258.15,1380.67
Bottom Layer:
  pour cut-out: 8.15,2085.67 13.15,2090.67 258.15,2090.67 258.15,1380.67 8.15,1380.67

## Silkscreen, mask and mechanical layers (free items; w line width, h text height)
Top Overlay:
  drawing of 6 lines, arcs and shapes, not listed
Mechanical 1:
  lines w10: 0,2754.75 0,0 0.91,-0.91 2755,-0.91 2755,2755 ; 0.25,2755 2756.16,2755

## Text inside footprints (layer, text, board x,y; h text height)
A1: Mechanical 15 "1" at 1154.41,2270 h62.99; Mechanical 15 "12" at 1524.41,2270 h62.99 r359